# Altium PCB MaryLadder_8bits.PcbDoc (part 1 of 2)
Units mil, origin at the board's own origin, x right, y up, seen from the top; angles counter-clockwise.
Board outline 2465.9 x 2730.18 mil, 4 copper layers (Top Layer, Layer 1, Layer 2, Bottom Layer), stack 61.461 mil thick; 110 components, 105 nets, 478 pads, 183 vias.
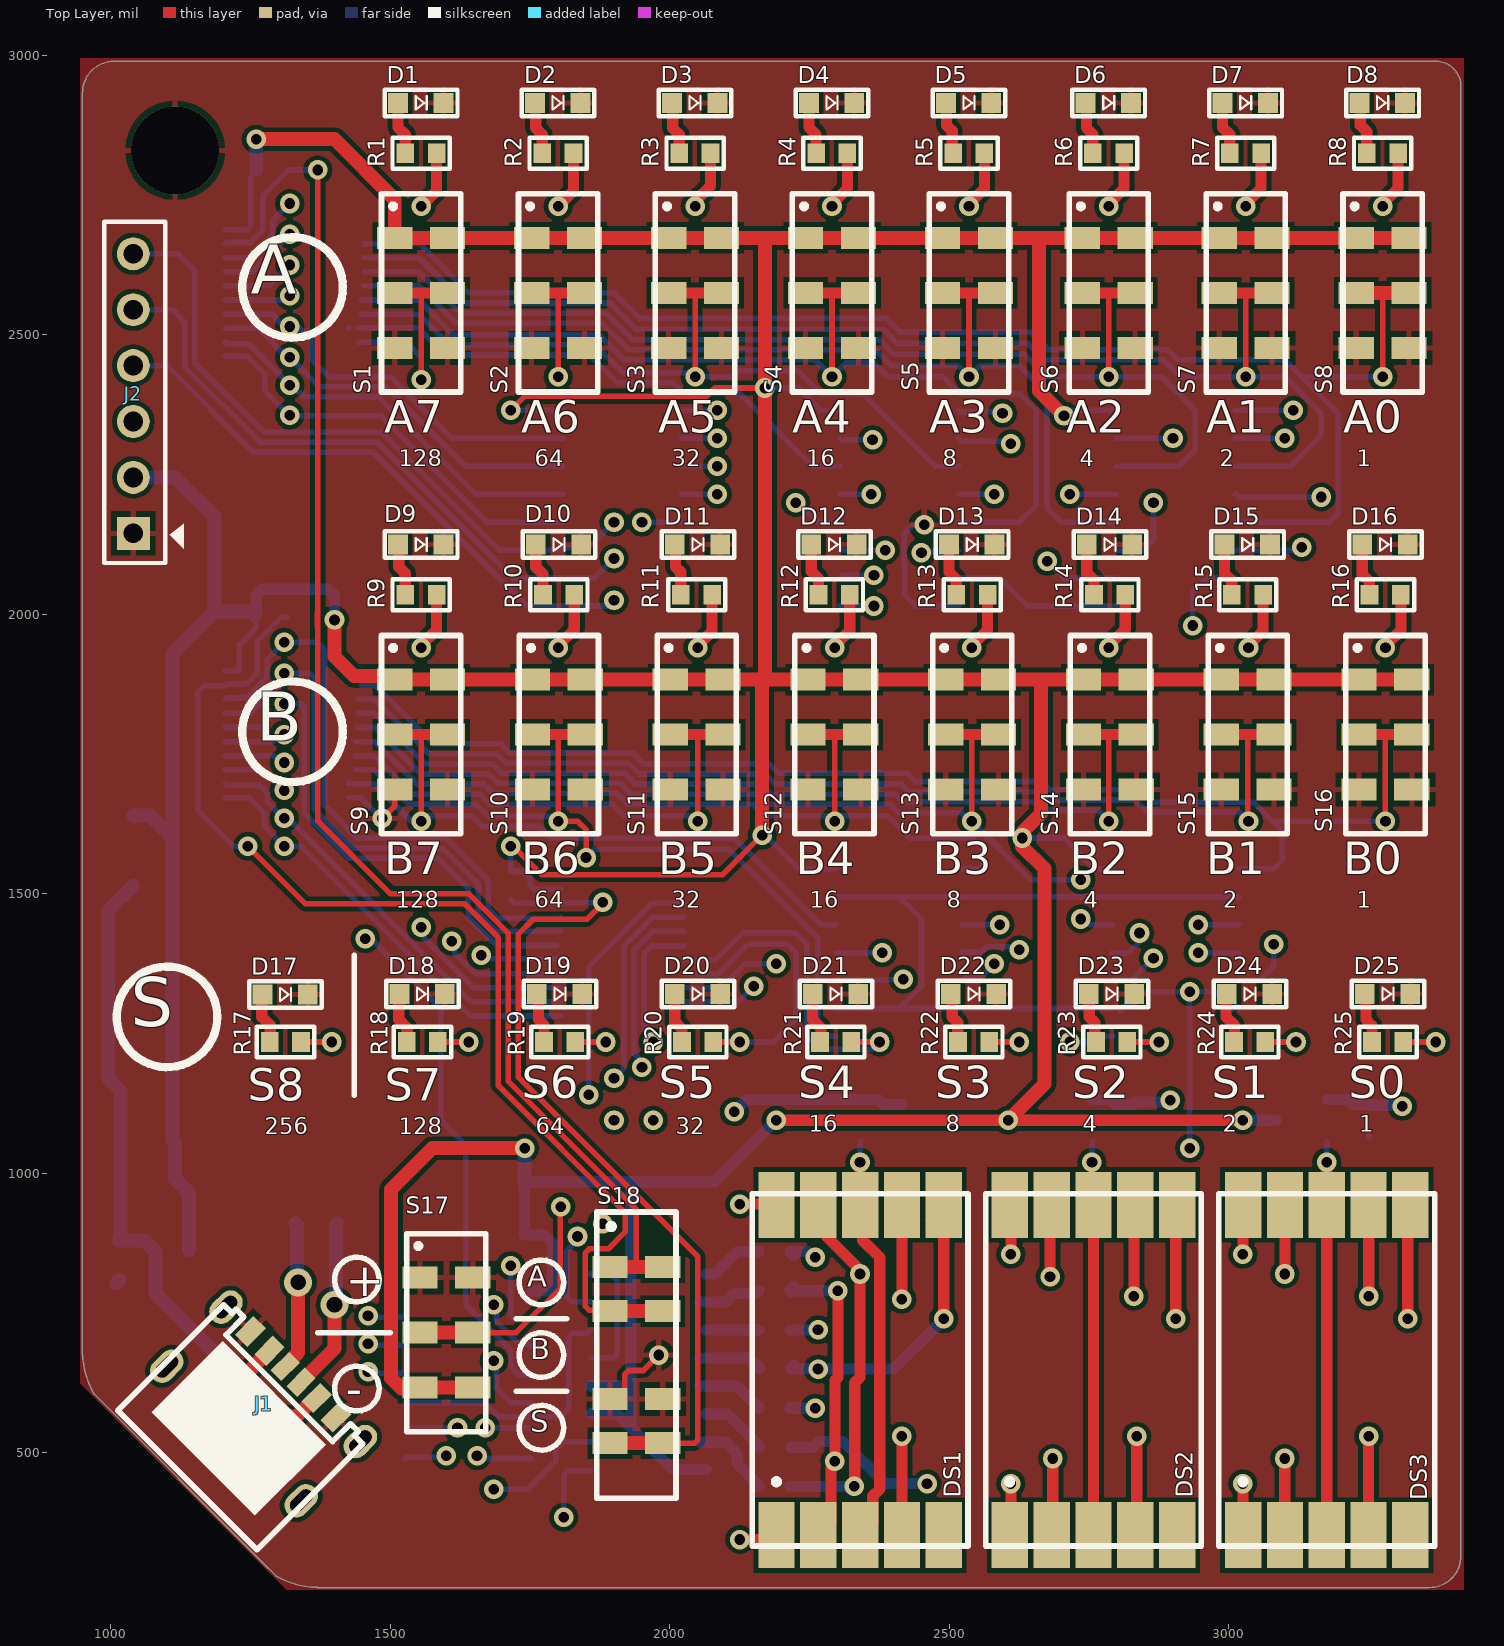
[diagram p0: Top Layer view]
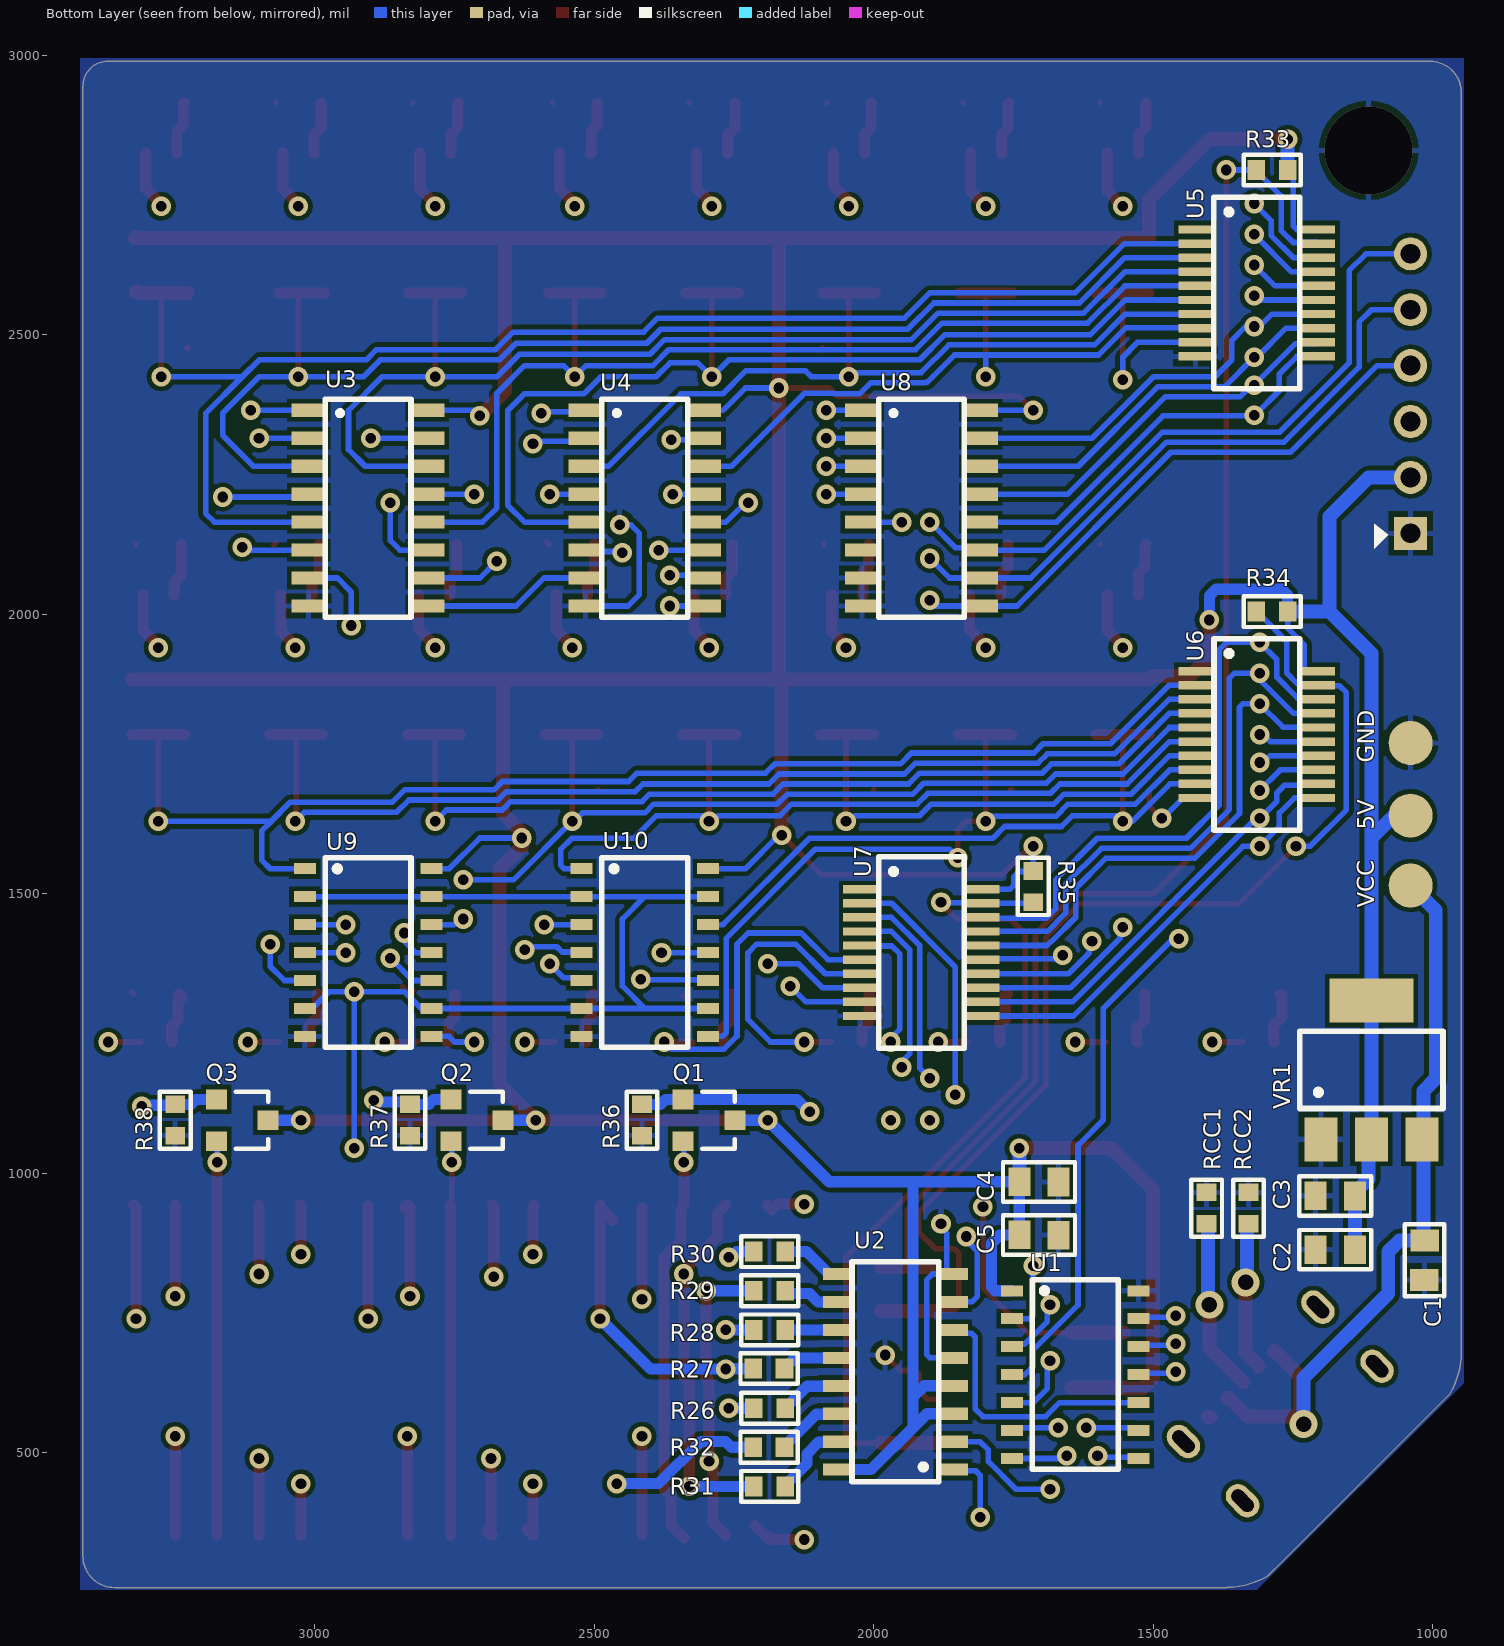
[diagram p1: Bottom Layer view, seen from below]
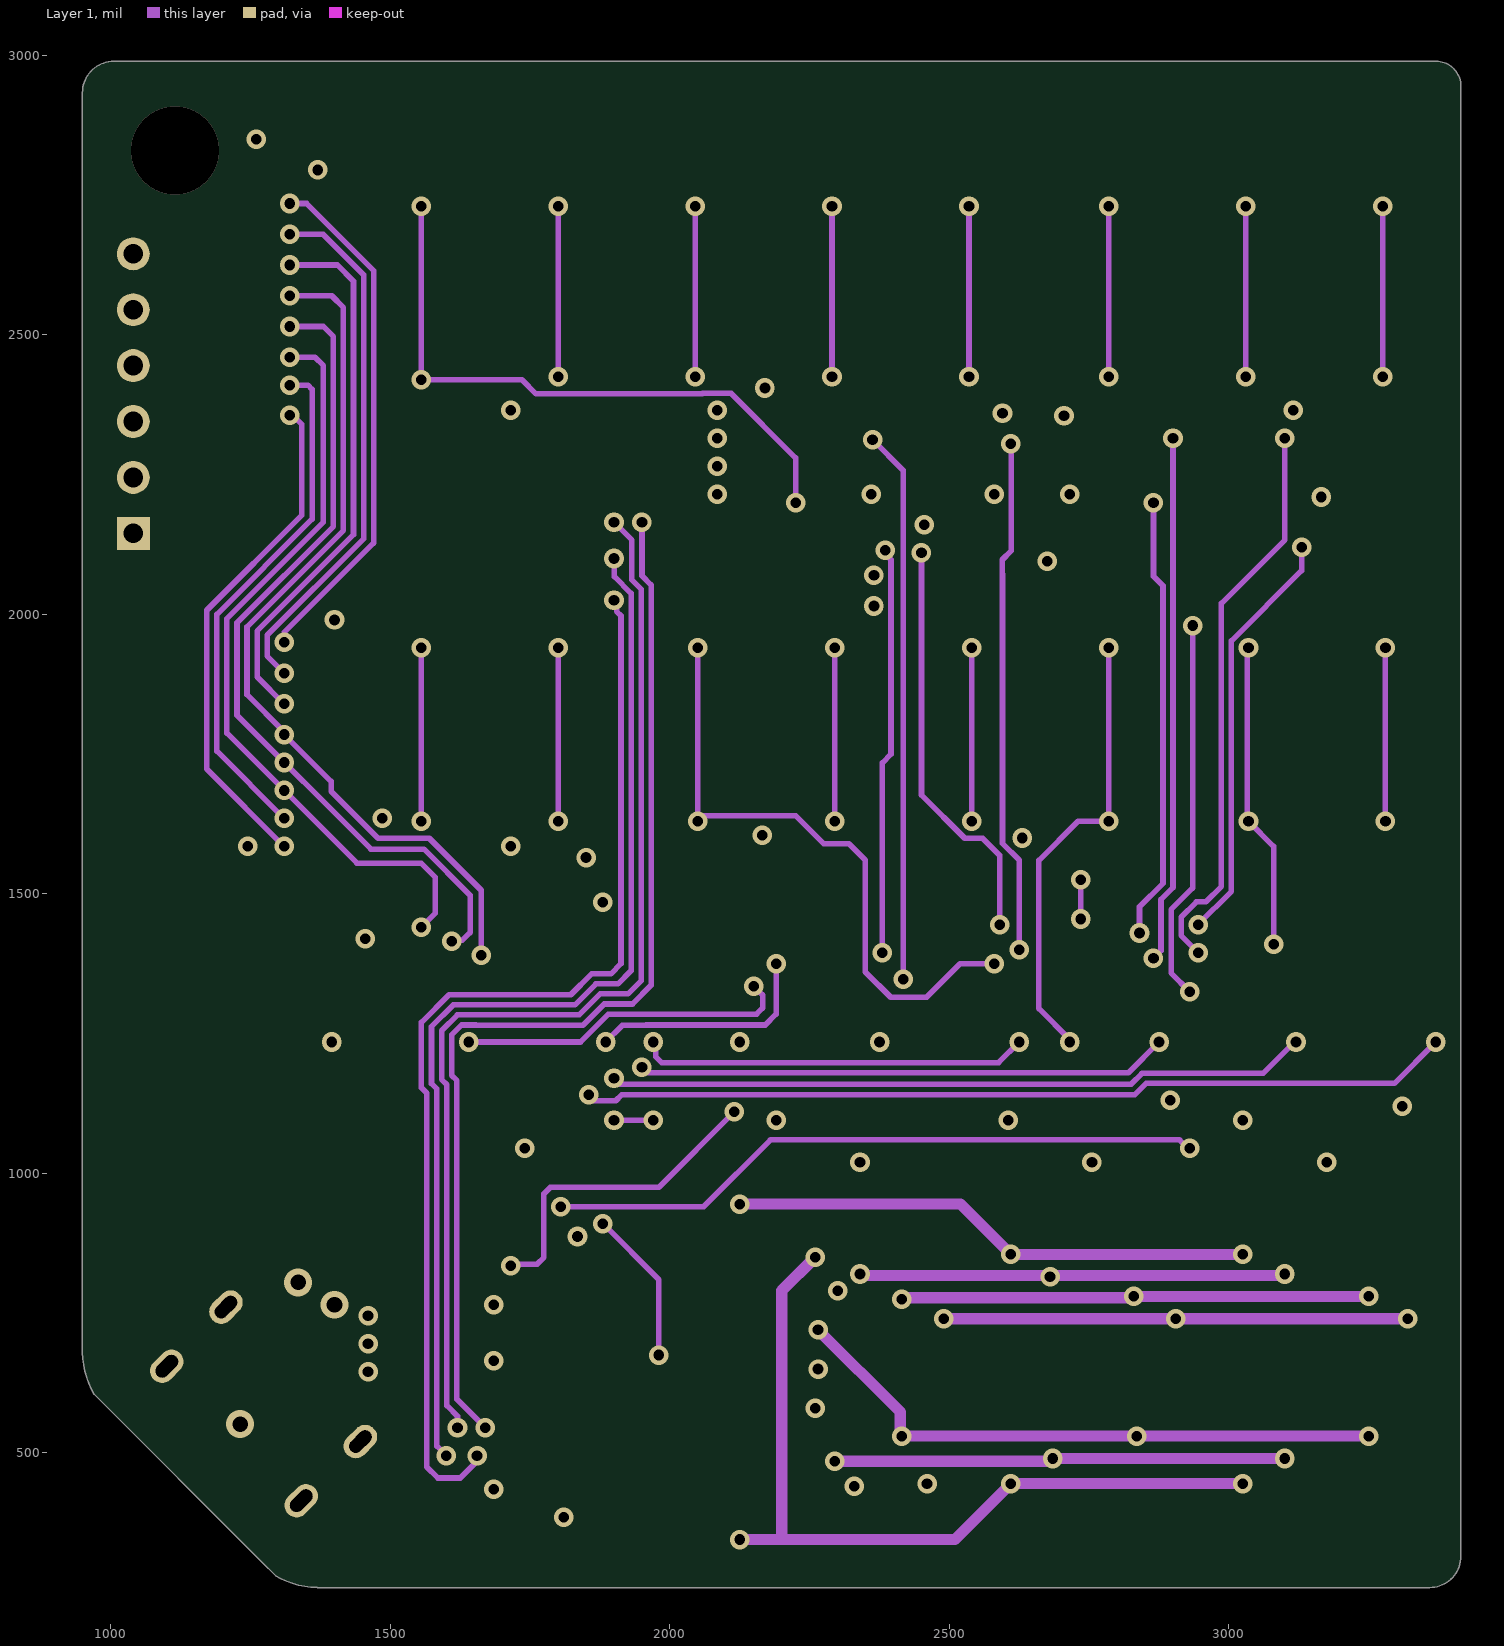
[diagram p2: Layer 1]
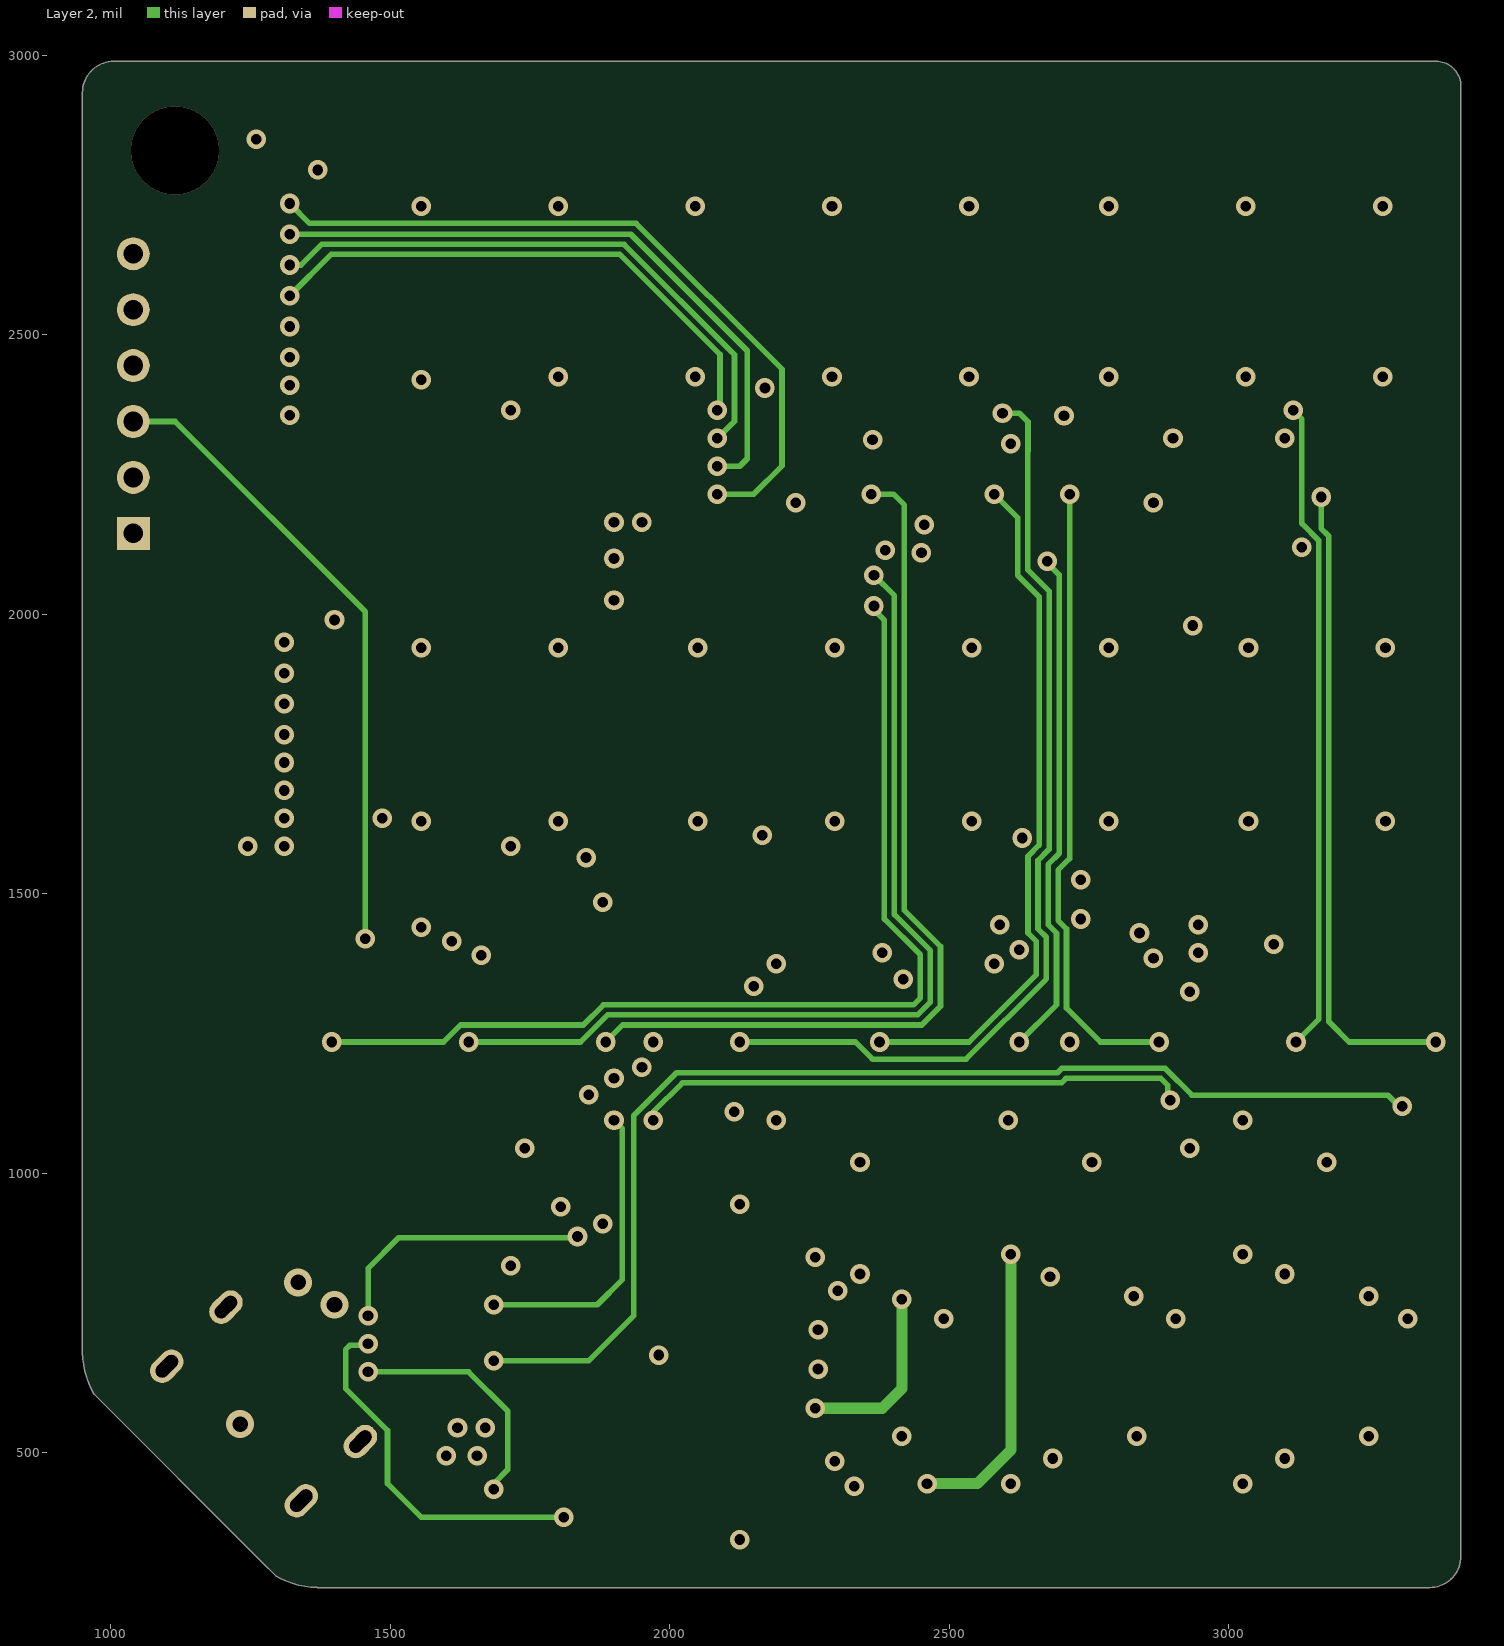
[diagram p3: Layer 2]
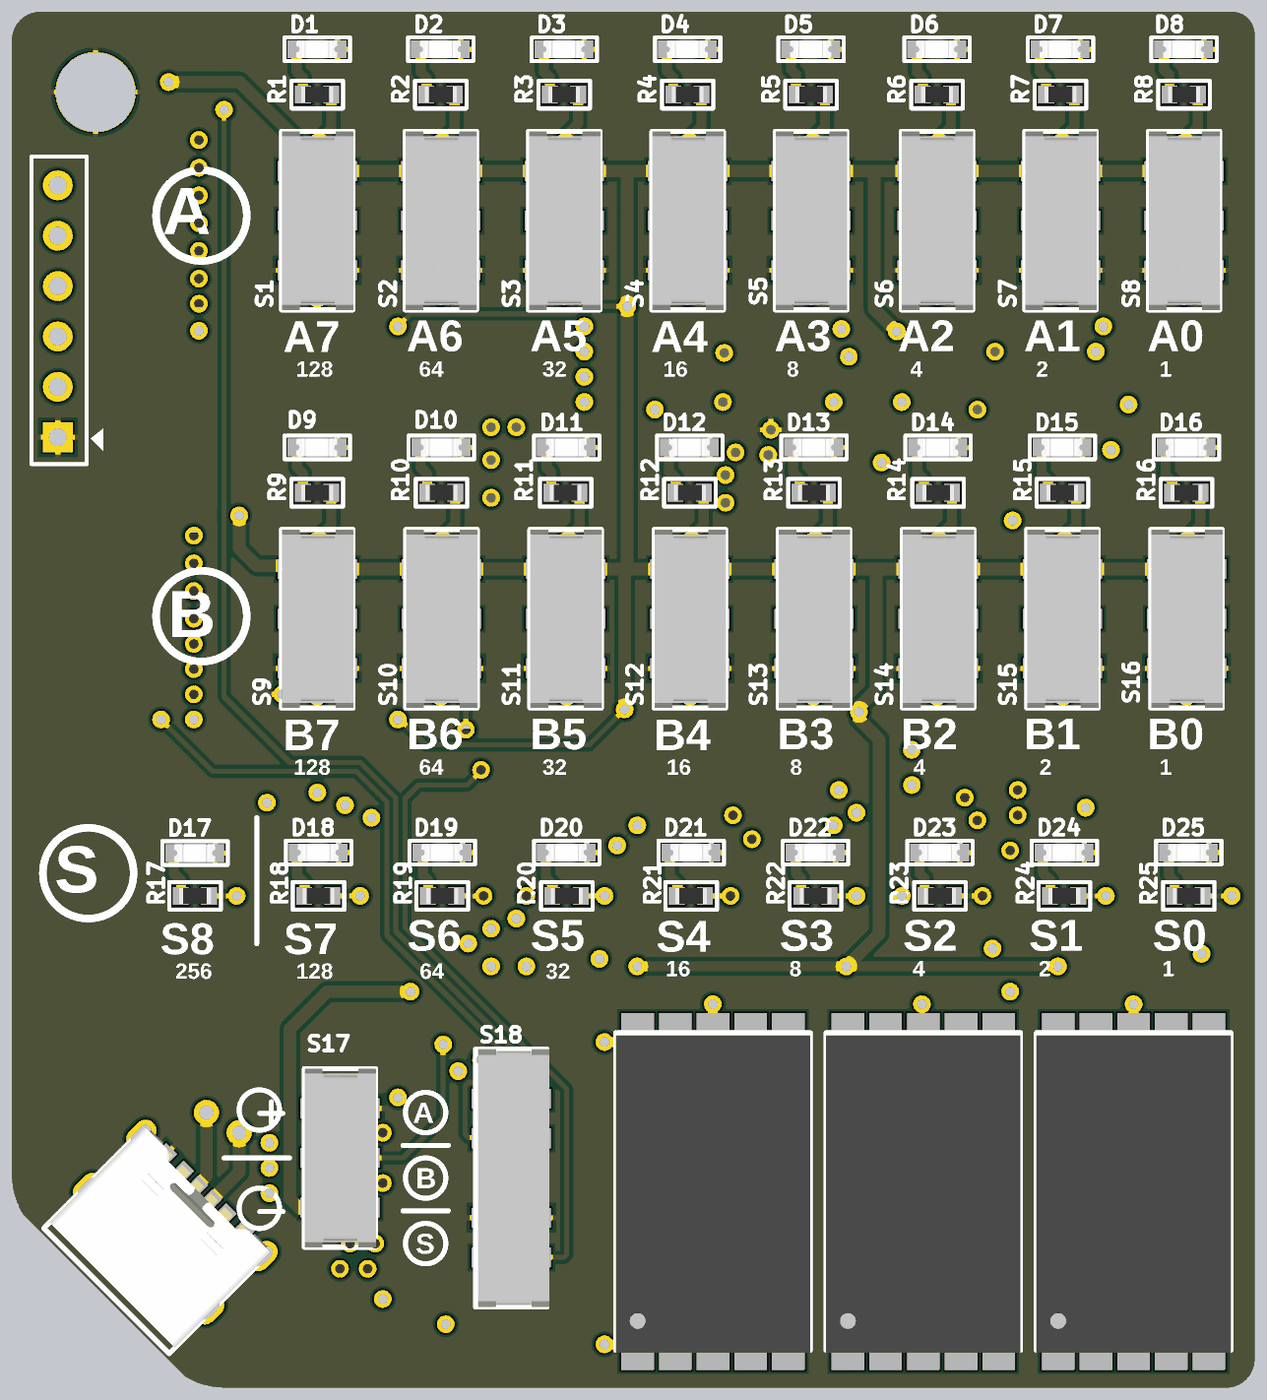
[diagram p5: 3D render of the assembled board from above, using the file's embedded part models]
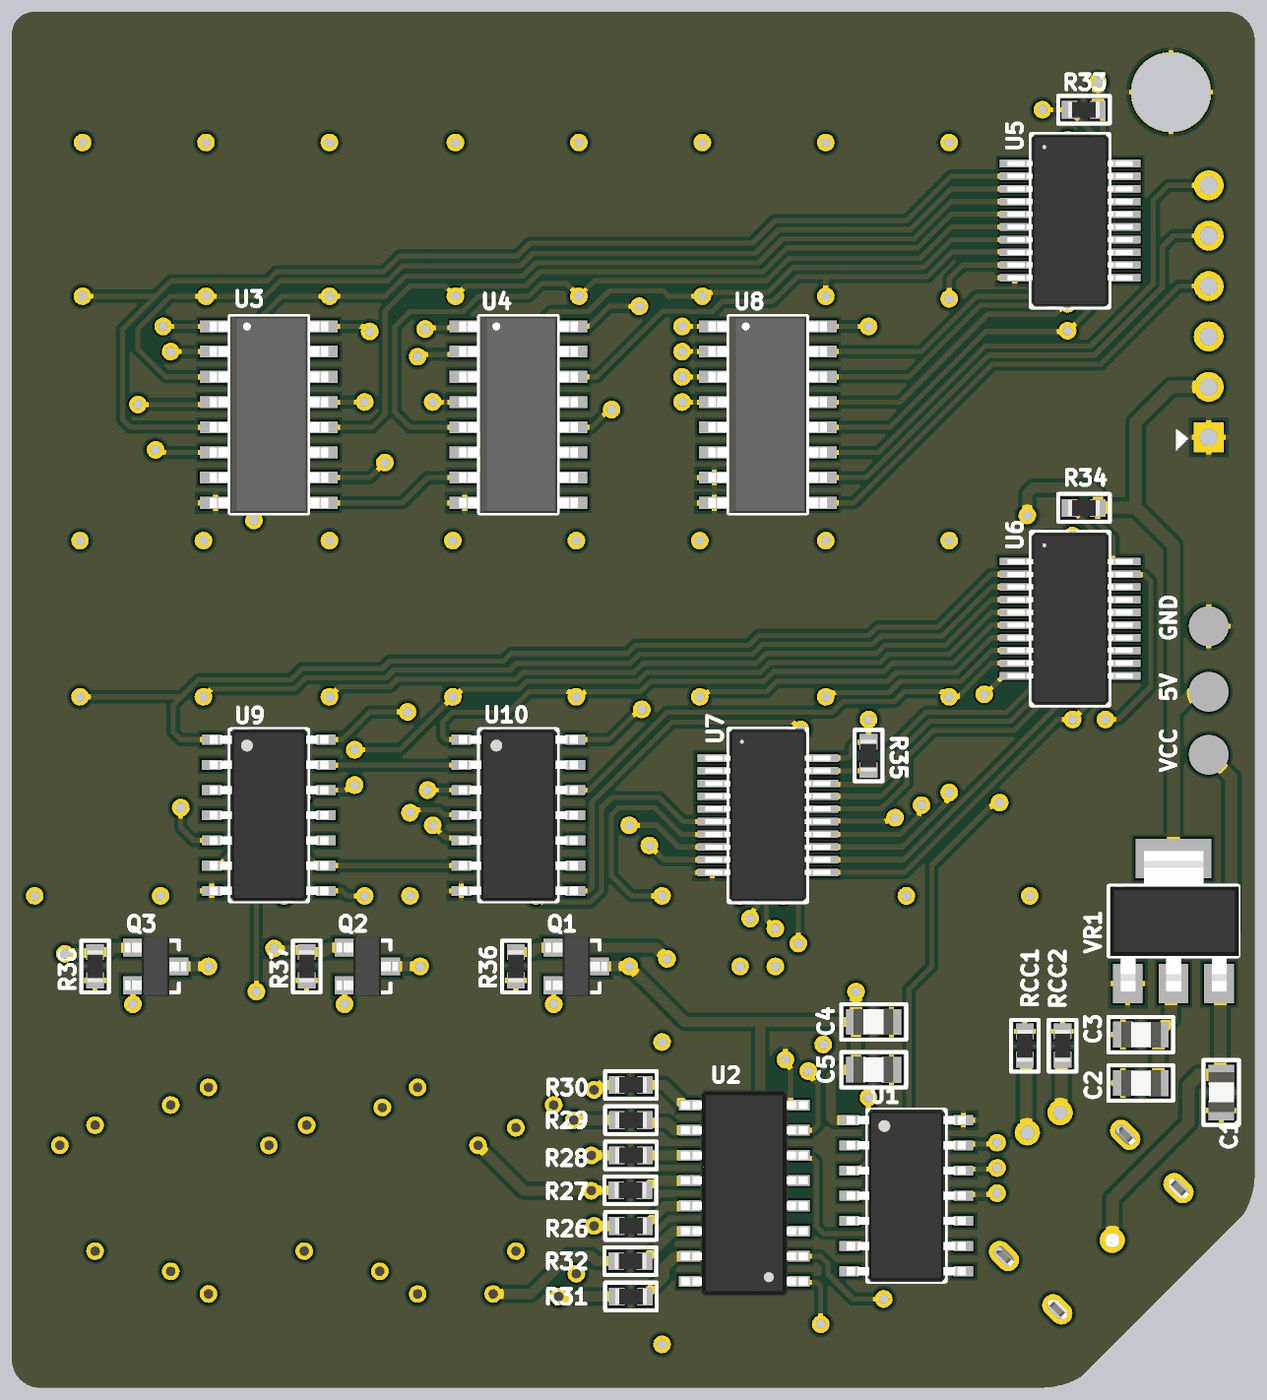
[diagram p6: 3D render of the assembled board from below, using the file's embedded part models]

## Layer stack, top to bottom
Top Solder: solder mask 0.4, Solder Resist, Dk 3.5
Top Layer: signal copper 1.4
Dielectric 2: prepreg 4.3307, PP-006, Dk 4.29
Layer 1: signal copper 1.3779
Dielectric 1: dielectric 47.2441, FR-4, Dk 4.8
Layer 2: signal copper 1.3779
Dielectric 3: prepreg 4.3307, PP-006, Dk 4.29
Bottom Layer: signal copper 1.4
Bottom Solder: solder mask 0.4, Solder Resist, Dk 3.5

## Board outline
970.41,604.62 cw(c1099.03,681.69) 949.1,680 949.1,2933.37 cw(c1005,2933.37) 1005,2989.27 3370.73,2989.27 cw(c3370.73,2945) 3415,2945 3415,315 cw(c3359.1,315) 3359.1,259.1 1369.15,259.1 1368.82,259.43 cw(c1370.48,406.99) 1294.63,280.4 1269.99,305.04 1269.96,305.07

## Design rules (kind name [scope] priority, off if disabled: settings)
Clearance [All] p1: gap=8 ignorepadtopadclearanceinfootprint=FALSE
PolygonConnect [All] p1: connectstyle=Relief reliefconductorwidth=10 reliefentries=4 polygonreliefangle="90 Angle" airgapwidth=10
RoomDefinition MaryLadder_8bits [InComponentClass('MaryLadder_8bits')] p1: confinementstyle=ConfineIn formatcopy=TRUE lockcomponents=FALSE outline 4060,300 3615,300 3615,790 4060,790
RoutingVias [All] p1: holewidth=19 width=35 viastyle="Through Hole" minholewidth=19 minwidth=35 maxholewidth=19 maxwidth=35
SolderMaskExpansion [All] p1: expansion=4 istentingtop=FALSE
Width [All] p1: maxlimit=100 minlimit=10 preferedwidth=10
30 further rules are at their usual default settings.

## Components (designator, comment, footprint, x,y, rotation, side; value= is the part's Value field where it differs from the comment)
5V "POINT_TEST_CMS_2MM" POINT_TEST_CMS_2MM 1040,1640 r0 top
C1 "CMS_0805" CONDENSATEUR_CMS_0805 1015.39,809.53 r90 bottom value=10uF
C2 "CMS_0805" CONDENSATEUR_CMS_0805 1210,863.66 r180 bottom value=10uF
C3 "CMS_0805" CONDENSATEUR_CMS_0805 1210,960 r180 bottom value=10uF
C4 "CMS_0805" CONDENSATEUR_CMS_0805 1669.53,984.61 r0 bottom value=10uF
C5 "CMS_0805" CONDENSATEUR_CMS_0805 1669.53,889.61 r0 bottom value=10uF
D1 "LED_CMS_0805" LED_CMS_0805 1513.66,2915 r90 top
D2 "LED_CMS_0805" LED_CMS_0805 1758.66,2915 r90 top
D3 "LED_CMS_0805" LED_CMS_0805 2003.66,2915 r90 top
D4 "LED_CMS_0805" LED_CMS_0805 2248.66,2915 r90 top
D5 "LED_CMS_0805" LED_CMS_0805 2493.66,2915 r90 top
D6 "LED_CMS_0805" LED_CMS_0805 2743.66,2915 r90 top
D7 "LED_CMS_0805" LED_CMS_0805 2988.66,2915 r90 top
D8 "LED_CMS_0805" LED_CMS_0805 3233.66,2915 r90 top
D9 "LED_CMS_0805" LED_CMS_0805 1513.66,2125 r90 top
D10 "LED_CMS_0805" LED_CMS_0805 1760.09,2125 r90 top
D11 "LED_CMS_0805" LED_CMS_0805 2008.75,2125 r90 top
D12 "LED_CMS_0805" LED_CMS_0805 2252.95,2125 r90 top
D13 "LED_CMS_0805" LED_CMS_0805 2499.38,2125 r90 top
D14 "LED_CMS_0805" LED_CMS_0805 2745.8,2125 r90 top
D15 "LED_CMS_0805" LED_CMS_0805 2992.23,2125 r90 top
D16 "LED_CMS_0805" LED_CMS_0805 3238.66,2125 r90 top
D17 "LED_CMS_0805" LED_CMS_0805 1271.1,1320 r90 top
D18 "LED_CMS_0805" LED_CMS_0805 1516.1,1320.91 r90 top
D19 "LED_CMS_0805" LED_CMS_0805 1761.88,1320.91 r90 top
D20 "LED_CMS_0805" LED_CMS_0805 2008.75,1320.91 r90 top
D21 "LED_CMS_0805" LED_CMS_0805 2255.62,1320.91 r90 top
D22 "LED_CMS_0805" LED_CMS_0805 2502.5,1320.91 r90 top
D23 "LED_CMS_0805" LED_CMS_0805 2749.38,1320.91 r90 top
D24 "LED_CMS_0805" LED_CMS_0805 2996.25,1320.91 r90 top
D25 "LED_CMS_0805" LED_CMS_0805 3243.12,1320.91 r90 top
DS1 "AFFICHEUR_7_SEGM_A.C_1_DIGIT" AFFICHEUR_7_SEGM_A.C_1_DIGIT 2340.39,648.33 r0 top
DS2 "AFFICHEUR_7_SEGM_A.C_1_DIGIT" AFFICHEUR_7_SEGM_A.C_1_DIGIT 2757.7,648.33 r0 top
DS3 "AFFICHEUR_7_SEGM_A.C_1_DIGIT" AFFICHEUR_7_SEGM_A.C_1_DIGIT 3175,648.33 r0 top
GND "POINT_TEST_CMS_2MM" POINT_TEST_CMS_2MM 1040,1770 r0 top
J1 "USB4125-GF-A" "TYPE-C FEMELLE" 1326.05,640.52 r315 top
J2 "BARRETTE_6 CONTACTS_1 RANGEE_MALE_DROITE" BARRETTE_6_M_D 1040,2145 r90 top
Q1 "TRANSISTOR_MOSFET-N_SOT23_GSD" TRANSISTOR_MOSFET-N_SOT23_GSD 2295,1095 r270 bottom
Q2 "TRANSISTOR_MOSFET-N_SOT23_GSD" TRANSISTOR_MOSFET-N_SOT23_GSD 2710,1095 r270 bottom
Q3 "TRANSISTOR_MOSFET-N_SOT23_GSD" TRANSISTOR_MOSFET-N_SOT23_GSD 3130,1095 r270 bottom
R1 "RESISTANCE_CMS_0603" RESISTANCE_CMS_0603 1582.56,2825 r180 top value=150
R2 "RESISTANCE_CMS_0603" RESISTANCE_CMS_0603 1827.56,2825 r180 top value=150
R3 "RESISTANCE_CMS_0603" RESISTANCE_CMS_0603 2072.56,2825 r180 top value=150
R4 "RESISTANCE_CMS_0603" RESISTANCE_CMS_0603 2317.56,2825 r180 top value=150
R5 "RESISTANCE_CMS_0603" RESISTANCE_CMS_0603 2562.56,2825 r180 top value=150
R6 "RESISTANCE_CMS_0603" RESISTANCE_CMS_0603 2812.56,2825 r180 top value=150
R7 "RESISTANCE_CMS_0603" RESISTANCE_CMS_0603 3057.56,2825 r180 top value=150
R8 "RESISTANCE_CMS_0603" RESISTANCE_CMS_0603 3302.56,2825 r180 top value=150
R9 "RESISTANCE_CMS_0603" RESISTANCE_CMS_0603 1582.56,2035 r180 top value=150
R10 "RESISTANCE_CMS_0603" RESISTANCE_CMS_0603 1828.99,2035 r180 top value=150
R11 "RESISTANCE_CMS_0603" RESISTANCE_CMS_0603 2075.42,2035 r180 top value=150
R12 "RESISTANCE_CMS_0603" RESISTANCE_CMS_0603 2321.84,2035 r180 top value=150
R13 "RESISTANCE_CMS_0603" RESISTANCE_CMS_0603 2568.27,2035 r180 top value=150
R14 "RESISTANCE_CMS_0603" RESISTANCE_CMS_0603 2814.7,2035 r180 top value=150
R15 "RESISTANCE_CMS_0603" RESISTANCE_CMS_0603 3061.13,2035 r180 top value=150
R16 "RESISTANCE_CMS_0603" RESISTANCE_CMS_0603 3307.56,2035 r180 top value=150
R17 "RESISTANCE_CMS_0603" RESISTANCE_CMS_0603 1340,1235 r180 top value=150
R18 "RESISTANCE_CMS_0603" RESISTANCE_CMS_0603 1585,1235 r180 top value=150
R19 "RESISTANCE_CMS_0603" RESISTANCE_CMS_0603 1830.77,1235 r180 top value=150
R20 "RESISTANCE_CMS_0603" RESISTANCE_CMS_0603 2077.65,1235 r180 top value=150
R21 "RESISTANCE_CMS_0603" RESISTANCE_CMS_0603 2324.52,1235 r180 top value=150
R22 "RESISTANCE_CMS_0603" RESISTANCE_CMS_0603 2571.4,1235 r180 top value=150
R23 "RESISTANCE_CMS_0603" RESISTANCE_CMS_0603 2818.27,1235 r180 top value=150
R24 "RESISTANCE_CMS_0603" RESISTANCE_CMS_0603 3065.15,1235 r180 top value=150
R25 "RESISTANCE_CMS_0603" RESISTANCE_CMS_0603 3312.02,1235 r180 top value=150
R26 "RESISTANCE_CMS_0603" RESISTANCE_CMS_0603 2159,580 r0 bottom value=150
R27 "RESISTANCE_CMS_0603" RESISTANCE_CMS_0603 2160,650.98 r0 bottom value=150
R28 "RESISTANCE_CMS_0603" RESISTANCE_CMS_0603 2159,720 r0 bottom value=150
R29 "RESISTANCE_CMS_0603" RESISTANCE_CMS_0603 2159,790 r0 bottom value=150
R30 "RESISTANCE_CMS_0603" RESISTANCE_CMS_0603 2159,860 r0 bottom value=150
R31 "RESISTANCE_CMS_0603" RESISTANCE_CMS_0603 2159,440 r0 bottom value=150
R32 "RESISTANCE_CMS_0603" RESISTANCE_CMS_0603 2160,510 r0 bottom value=150
R33 "RESISTANCE_CMS_0603" RESISTANCE_CMS_0603 1260,2795 r0 bottom value=10k
R34 "RESISTANCE_CMS_0603" RESISTANCE_CMS_0603 1260,2005 r0 bottom value=10k
R35 "RESISTANCE_CMS_0603" RESISTANCE_CMS_0603 1715,1541 r270 bottom value=10k
R36 "RESISTANCE_CMS_0603" RESISTANCE_CMS_0603 2415,1067.44 r90 bottom value=10k
R37 "RESISTANCE_CMS_0603" RESISTANCE_CMS_0603 2830,1067.44 r90 bottom value=10k
R38 "RESISTANCE_CMS_0603" RESISTANCE_CMS_0603 3250,1067.44 r90 bottom value=10k
RCC1 "RESISTANCE_CMS_0603" RESISTANCE_CMS_0603 1405,910 r90 bottom value=5,1K
RCC2 "RESISTANCE_CMS_0603" RESISTANCE_CMS_0603 1330,910 r90 bottom value=5,1K
S1 "JS202011JCQN" JS202011JCQN 1555,2575 r0 top
S2 "JS202011JCQN" JS202011JCQN 1800,2575 r0 top
S3 "JS202011JCQN" JS202011JCQN 2045,2575 r0 top
S4 "JS202011JCQN" JS202011JCQN 2290,2575 r0 top
S5 "JS202011JCQN" JS202011JCQN 2535,2575 r0 top
S6 "JS202011JCQN" JS202011JCQN 2785,2575 r0 top
S7 "JS202011JCQN" JS202011JCQN 3030,2575 r0 top
S8 "JS202011JCQN" JS202011JCQN 3275,2575 r0 top
S9 "JS202011JCQN" JS202011JCQN 1555,1785 r0 top
S10 "JS202011JCQN" JS202011JCQN 1801.43,1785 r0 top
S11 "JS202011JCQN" JS202011JCQN 2047.86,1785 r0 top
S12 "JS202011JCQN" JS202011JCQN 2294.29,1785 r0 top
S13 "JS202011JCQN" JS202011JCQN 2540.71,1785 r0 top
S14 "JS202011JCQN" JS202011JCQN 2787.14,1785 r0 top
S15 "JS202011JCQN" JS202011JCQN 3033.57,1785 r0 top
S16 "JS202011JCQN" JS202011JCQN 3280,1785 r0 top
S17 "JS202011JCQN" JS202011JCQN 1600,715 r0 top
S18 "JS203011JCQN" JS203011JCQN 1940,675 r0 top
U1 "ATTINY84V" ATTINY84V-10SSU 1640,640 r180 bottom
U2 "CD4511" CD4511 1961.65,645 r0 bottom
U3 "CD74ACT283M" CD74ACT283M 2905,2190 r180 bottom
U4 "CD74ACT283M" CD74ACT283M 2410,2190 r180 bottom
U5 "QS32245QG" QS32245QG 1315.04,2575 r180 bottom
U6 "QS32245QG" QS32245QG 1315,1785 r180 bottom
U7 "QS32245QG" QS32245QG 1915,1395 r180 bottom
U8 "74HC151D" 74HC151D 1915,2190 r180 bottom
U9 "CD4030BM96" CD4030BM96 2905,1395 r180 bottom
U10 "CD4030BM96" CD4030BM96 2410,1395 r180 bottom
VCC "POINT_TEST_CMS_2MM" POINT_TEST_CMS_2MM 1040,1515 r90 top
VR1 "NCV1117ST50T3G" NCV1117ST50T3G 1110,1185 r180 bottom

## Footprints (in the part's own frame and the unit in brackets; to place one, negate y for a bottom-side part, rotate by r counter-clockwise, add the part's x,y. Pads: shape width x height; smd on the part's side, far side on the other; paste and mask are expansions set on the pad)
74HC151D [mm] "IC MULTIPLEXER 1 X 8:1"
  rect 1.55x0.6 smd: 1(-2.7,4.445) 2(-2.7,3.175) 3(-2.7,1.905) 4(-2.7,0.635) 5(-2.7,-0.635) 6(-2.7,-1.905) 7(-2.7,-3.175) 8(-2.7,-4.445) 9(2.7,-4.445) 10(2.7,-3.175) 11(2.7,-1.905) 12(2.7,-0.635) 13(2.7,0.635) 14(2.7,1.905) 15(2.7,3.175) 16(2.7,4.445)
  silkscreen extent -1.95,-4.95 1.95,4.95, body extent -2.99,-4.95 2.99,4.95, height 1.35
AFFICHEUR_7_SEGM_A.C_1_DIGIT [mm] "VDMR10A1 - DISPLAY 7SEG 0.39\" SGL RED 10SMD"
  rect 1.65x3 smd: 1(-3.8,-7.5) 2(-1.9,-7.5) 3(0,-7.5) 4(1.9,-7.5) 5(3.8,-7.5) 6(3.8,7.5) 7(1.9,7.5) 8(0,7.5) 9(-1.9,7.5) 10(-3.8,7.5)
  silkscreen extent -4.9,-8 4.9,8, body extent -4.9,-8.13 4.9,7.87, height 2.11
ATTINY84V-10SSU [mm] "AVR series Microcontrôleurs IC 8 bits 10MHz 8Ko (4K x 16) FLASH 14-SOIC"
  rect 1x0.5 smd: 1(-2.875,3.81) 2(-2.875,2.54) 3(-2.875,1.27) 4(-2.875,0) 5(-2.875,-1.27) 6(-2.875,-2.54) 7(-2.875,-3.81) 8(2.875,-3.81) 9(2.875,-2.54) 10(2.875,-1.27) 11(2.875,0) 12(2.875,1.27) 13(2.875,2.54) 14(2.875,3.81)
  silkscreen extent -1.95,-4.31 1.95,4.31, body extent -3,-4.35 3,4.35, height 1.75
BARRETTE_6_M_D [mm] "BARRETTE 6 CONTACTS ; 1 RANGEE ; DROITE ; MALE ; ESPACEMENT BROCHES = 2.54 mm"
  rect 1.5x1.5 hole 0.9: 1(0,0)
  round 1.5 hole 0.9: 2(2.54,0) 3(5.08,0) 4(7.62,0) 5(10.16,0) 6(12.7,0)
  silkscreen extent -1.35,-1.46 14.15,1.32, body extent -1.22,-1.34 14.02,1.2, height 0.25
CD74ACT283M [mm] "4-Bit Binary Fill Adder With Fast Carry"
  rect 1.55x0.6 smd: 1(-2.7,4.445) 2(-2.7,3.175) 3(-2.7,1.905) 4(-2.7,0.635) 5(-2.7,-0.635) 6(-2.7,-1.905) 7(-2.7,-3.175) 8(-2.7,-4.445) 9(2.7,-4.445) 10(2.7,-3.175) 11(2.7,-1.905) 12(2.7,-0.635) 13(2.7,0.635) 14(2.7,1.905) 15(2.7,3.175) 16(2.7,4.445)
  silkscreen extent -1.95,-4.95 1.95,4.95, body extent -2.99,-4.95 2.99,4.95, height 1.35
CD4030BM96 [mm] "IC GATE XOR 4CH 2-INP 14SOIC"
  rect 1x0.5 smd: 1(-2.875,3.81) 2(-2.875,2.54) 3(-2.875,1.27) 4(-2.875,0) 5(-2.875,-1.27) 6(-2.875,-2.54) 7(-2.875,-3.81) 8(2.875,-3.81) 9(2.875,-2.54) 10(2.875,-1.27) 11(2.875,0) 12(2.875,1.27) 13(2.875,2.54) 14(2.875,3.81)
  silkscreen extent -1.95,-4.31 1.95,4.31, body extent -3,-4.35 3,4.35, height 1.75
CD4511 [mm] "CMOS BCD to 7 Segment Latch Decoder Drivers"
  rect 1.35x0.55 smd: 1(-2.625,4.445) 2(-2.625,3.175) 3(-2.625,1.905) 4(-2.625,0.635) 5(-2.625,-0.635) 6(-2.625,-1.905) 7(-2.625,-3.175) 8(-2.625,-4.445) 9(2.625,-4.445) 10(2.625,-3.175) 11(2.625,-1.905) 12(2.625,-0.635) 13(2.625,0.635) 14(2.625,1.905) 15(2.625,3.175) 16(2.625,4.445)
  silkscreen extent -1.97,-5 1.97,5, body extent -3.2,-5.2 3.2,5.2, height 2.1
CONDENSATEUR_CMS_0805 [mm] "CONDENSATEUR CMS 0805 ; DIMENSIONS : 2mm x 1.25mm"
  rect 1x1.3 smd: 1(0,0) 2(1.79,-0.01)
  silkscreen extent -0.74,-0.9 2.53,0.89, body extent -0.09,-0.67 1.91,0.64, height 0.73
JS202011JCQN [mm] "SWITCH SLIDE DPDT 300MA 6V"
  rect 1.6x1 smd: 1(-1.2,2.5) 2(-1.2,0) 3(-1.2,-2.5) 4(1.2,2.5) 5(1.2,0) 6(1.2,-2.5)
  silkscreen extent -1.8,-4.5 1.8,4.5, body extent -1.78,-4.5 1.82,4.5, height 5.57
JS203011JCQN [mm] "SWITCH SLIDE DP3T 300MA 6V"
  rect 1.6x1 smd: 1(-1.2,4) 2(-1.2,2) 3(-1.2,-2) 4(-1.2,-4) 5(1.2,4) 6(1.2,2) 7(1.2,-2) 8(1.2,-4)
  silkscreen extent -1.8,-6.5 1.8,6.5, body extent -1.67,-6.5 1.93,6.5, height 5.62
LED_CMS_0805 [mm] "LED CMS 0805 ; DIMENSIONS : 2.0mm x 0.9mm"
  rect 0.9x0.9 smd: 1(0,0) 2(0,-2.063)
  silkscreen extent -0.6,-2.7 0.6,0.6, body extent -0.45,-2.06 0.45,0, height 0.85
NCV1117ST50T3G [mm] "IC REG LINEAR 5V 1A SOT223"
  rect 1.5x2 smd: 1(-2.3,-3.15) 2(0,-3.15) 3(2.3,-3.15)
  rect 3.8x2 smd: 2(0,3.15)
  silkscreen extent -3.25,-1.75 3.25,1.75, body extent -3.2,-3.54 3.3,3.54, height 1.5
POINT_TEST_CMS_2MM [mm] "*"
  round 2 smd far side: 1(0,0)
QS32245QG [mm] "IC BUS SWITCH 1 X 8:1 20QSOP"
  rect 1.52x0.38 smd: 1(-2.795,2.88) 2(-2.795,2.24) 3(-2.795,1.6) 4(-2.795,0.96) 5(-2.795,0.32) 6(-2.795,-0.32) 7(-2.795,-0.96) 8(-2.795,-1.6) 9(-2.795,-2.24) 10(-2.795,-2.88) 11(2.795,-2.88) 12(2.795,-2.24) 13(2.795,-1.6) 14(2.795,-0.96) 15(2.795,-0.32) 16(2.795,0.32) 17(2.795,0.96) 18(2.795,1.6) 19(2.795,2.24) 20(2.795,2.88)
  silkscreen extent -1.95,-4.35 1.95,4.35, body extent -3.16,-4.35 3.16,4.35, height 1.1
RESISTANCE_CMS_0603 [mm] "RESISTANCE CMS 0603 ; DIMENSIONS : 1.6mm x 0.8mm"
  rect 0.8x0.9 smd: 1(0,0) 2(1.422,0)
  silkscreen extent -0.6,-0.7 2,0.7, body extent -0.1,-0.4 1.5,0.4, height 0.44
TRANSISTOR_MOSFET-N_SOT23_GSD [mm] "SOT23 ; DIMENSIONS : 3.0mm x 2.5 mm"
  rect 0.9x0.95 smd: 1(-0.95,-1.175) 2(0.95,-1.175) 3(0,1.175)
  silkscreen extent -1.3,-0.3 1.3,1.18, body extent -1.5,-1.57 1.5,1.57, height 1.1
"TYPE-C FEMELLE" [mm] "USB4125-GF-A / CONN RCPT TYPE C 6P SMD RA"
  rrect100% 1.1x1.7 hole 1.2 slot 0.6 at 0 deg: 1(-4.32,0) 2(4.32,0) 3(-4.32,-3.8) 4(4.32,-3.8)
  rect 0.7x1.2 smd: A5(-0.5,0) B5(0.5,0)
  rect 0.76x1.2 smd: A9(1.52,0) B9(-1.52,0)
  rect 0.8x1.2 smd: A12(2.75,0) B12(-2.75,0)
  silkscreen extent -4.47,-6.8 4.47,0.25, body extent -4.47,-6.39 4.47,0.51, height 3.26

## Part data
C1 C2 C3 C4 C5: library part CONDENSATEUR_CMS_CER_0805, "CONDENSATEUR CMS CERAMIQUE 0805", Type=CMS_0805
D1 D2 D3 D4 D5 D6 D7 D8 D9 D10 D11 D12 D13 D14 D15 D16 D17 D18 D19 D20 D21 D22 D23 D24 D25: "LED CMS 0805", Type=CMS_0805
DS1 DS2 DS3: "VDMR10A1 - DISPLAY 7SEG 0.39\" SGL RED 10SMD", Type=SMD-10
J1: library part "TYPE-C FEMELLE", "CONN RCPT TYPE C 6P SMD RA"
J2: "BARRETTE 6 CONTACTS 1 RANGEE MALE DROITE", Type=M_D_6
Q1 Q2 Q3: "TRANSISTOR MOSFET CANAL N BOITIER SOT23_GSD", Package=N_SOT23
R1 R2 R3 R4 R5 R6 R7 R8 R9 R10 R11 R12 R13 R14 R15 R16 R17 R18 R19 R20 R21 R22 R23 R24 R25 R26 R27 R28 R29 R30 R31 R32 R33 R34 R35 R36 R37 R38 RCC1 RCC2: "RESISTANCE CMS 0603", Type=CMS_0603
S1 S2 S3 S4 S5 S6 S7 S8 S9 S10 S11 S12 S13 S14 S15 S16 S17: "SWITCH SLIDE DPDT 300MA 6V"
S18: "SWITCH SLIDE DP3T 300MA 6V"
U1: library part ATTINY84V-10SSU, "AVR series Microcontrôleurs IC 8 bits 10MHz 8Ko (4K x 16) FLASH 14-SOIC", Type=SOIC-14
U2: "CMOS BCD to 7 Segment Latch Decoder Drivers"
U3 U4: "4-Bit Binary Fill Adder With Fast Carry", Type=SOIC-16
U5 U6 U7: "IC BUS SWITCH 1 X 8:1 20QSOP", Type=QSOP-20
U8: "IC MULTIPLEXER 1 X 8:1", Type=SOIC-16
U9 U10: "IC GATE XOR 4CH 2-INP 14SOIC"
VR1: "IC REG LINEAR 5V 1A SOT223", Type=SOT-223

## Via types
v1: diameter 35, hole 19, Top Layer to Bottom Layer, 179 vias
v2: diameter 50, hole 28, Top Layer to Bottom Layer, 3 vias
v3: diameter 157.48, hole 157.48, Top Layer to Bottom Layer, 1 vias

## Nets (pads, with @x,y where several pads share a name; then routed paths per layer and width w, separated by ;. In a path a pad name is that pad's centre, name@x,y a point inside that pad or via, vN(x,y) a via of type N, cw(c..) or ccw(c..) an arc to the next point about the centre after c; other vN are vias at no path point)
5V: 5V.1 C2.2 C3.2 C4.2 C5.2 J2.2 Q1.3 Q2.3 Q3.3 R33.1 R34.1 R35.1 S1.1 S1.4 S2.1 S2.4 S3.1 S3.4 S4.1 S4.4 S5.1 S5.4 S6.1 S6.4 S7.1 S7.4 S8.1 S8.4 S9.1 S9.4 S10.1 S10.4 S11.1 S11.4 S12.1 S12.4 S13.1 S13.4 S14.1 S14.4 S15.1 S15.4 S16.1 S16.4 S17.3 S17.6 U1.1 U2.3 U2.4 U2.16 U3.16 U4.16 U5.20 U6.20 U7.20 U8.16 U9.14 U10.14 VR1.2 | length 13885.7
  Top Layer w10: v1@1715,1590 1770.5,1534.5 2094.5,1534.5 v1(2165,1605) ; v1(1715,2365) 1740,2390 2065,2390 2080,2405 v1(2170,2405)
  Top Layer w20: v1(2190,1095) v1(2605,1095) v1(3025,1095)
  Top Layer w25: v1(1260,2850) 1400,2850 1507.76,2742.24 S1.1@1507.76,2673.43 S1.4@1602.24,2673.43 S2.1@1752.76,2673.43 S2.4@1847.24,2673.43 S3.1@1997.76,2673.43 S3.4@2092.24,2673.43 2167.5,2673.43 ; v1(1400,1990) 1400,1925 1435,1890 1501.18,1890 S9.1@1507.76,1883.43 S9.4@1602.24,1883.43 S10.1@1754.18,1883.43 S10.4@1848.67,1883.43 S11.1@2000.61,1883.43 S11.4@2095.1,1883.43 2168.93,1883.43 ; S17.6@1647.24,616.57 S17.3@1552.76,616.57 1551.18,615 1519.64,615 1500.76,633.88 1500.76,970.76 1575,1045 v1(1740,1045) ; v1(2165,1605) 2165,1879.5 2168.93,1883.43 ; v1(2605,1095) 2670,1160 2670,1545 2630,1585 v1(2630,1600) 2631.91,1601.91 2631.91,1611.91 2663.93,1643.93 2663.93,1883.43 ; v1(2705,2355) 2660,2400 2660,2673.43 ; S8.4@3322.24,2673.43 3321.57,2673.43 3320,2675 3318.43,2673.43 S8.1@3227.76,2673.43 S7.4@3077.24,2673.43 S7.1@2982.76,2673.43 S6.4@2832.24,2673.43 S6.1@2737.76,2673.43 2660,2673.43 ; S16.4@3327.24,1883.43 S16.1@3232.76,1883.43 S15.4@3080.82,1883.43 S15.1@2986.33,1883.43 S14.4@2834.39,1883.43 S14.1@2739.9,1883.43 2663.93,1883.43 ; 2167.5,2673.43 2170,2670.93 v1(2170,2405) 2170,1884.5 2168.93,1883.43 ; 2167.5,2673.43 S4.1@2242.76,2673.43 S4.4@2337.24,2673.43 S5.1@2487.76,2673.43 S5.4@2582.24,2673.43 2660,2673.43 ; 2168.93,1883.43 S12.1@2247.04,1883.43 S12.4@2341.53,1883.43 S13.1@2493.47,1883.43 S13.4@2587.96,1883.43 2663.93,1883.43
  Bottom Layer w10: U6.20@1204.96,1898.39 1227.4,1898.39 1229.88,1900.87 1229.88,1945.34 1260,1975.46 R34.1@1260,2003.03 ; U5.20@1205,2688.39 1243.39,2688.39 1250,2695 1250,2783.03 1260,2793.03 R33.1@1260,2795 ; v1(1715,1585) R35.1@1715,1541 1716,1540 1740,1540 1750,1530 1750,1515 1756.61,1508.39 U7.20@1804.96,1508.39 ; v1(1715,2365) U8.16@1808.7,2365 ; v1(2165,1605) 2170,1605 2230,1545 U10.14@2296.81,1545 ; v1(2170,2405) 2230,2405 2270,2365 U4.16@2303.7,2365 ; v1(2630,1600) 2705,1600 2760,1545 U9.14@2791.81,1545 ; v1(2705,2355) 2715,2365 U3.16@2798.7,2365
  Bottom Layer w20: R34.1@1260,2005 1260,2035 1270,2045 1388.28,2045 1400,2033.28 v1(1400,1990) ; U1.1@1753.19,790 1783.28,790 1790,796.72 1790,875 1775,890 C5.2@1740,890 C4.2@1740,985 1930,985 ; U2.3@1858.31,570 1905,570 1930,545 ; U2.4@1858.31,620 1910,620 1930,600 ; U2.16@2065,470 2005,470 1930,545 ; Q1.3@2248.74,1095 v1(2190,1095) 2080,985 1930,985 ; v1(2605,1095) Q2.3@2663.74,1095 ; v1(3025,1095) Q3.3@3083.74,1095 ; 1930,545 1930,600 ; 1930,600 1930,985
  Bottom Layer w25: 5V.1@1040,1640 1070,1640 1110,1600 ; J2.2@1040,2245 1115,2245 1185,2175 1185,2005 ; C2.2@1139.53,863.27 C3.2@1139.53,959.61 1139.53,965.51 1115,990.04 1115,1055.98 VR1.2@1110,1060.98 VR1.2@1110,1309.02 1110,1600 ; R34.1@1260,2005 1260,2003.03 1256.75,1999.78 1254.78,1999.78 1249.57,2005 1185,2005 ; R33.1@1260,2795 v1(1260,2850) ; C4.2@1740,985 v1(1740,1045) ; 1110,1600 1110,1930 1185,2005
A0: R8.1 S8.2 S8.5 U3.5 U5.2 | length 3041.4
  Top Layer w10: 3272.76,2575 3275,2572.76 v1(3275,2425)
  Top Layer w20: v1(3275,2730) 3275,2734.06 3302.56,2761.62 R8.1@3302.56,2825 ; S8.5@3320,2577.24 S8.5@3322.24,2575
  Top Layer w25: S8.2@3227.76,2575 3272.76,2575 3317.76,2575 S8.5@3320,2577.24
  Layer 1 w10: v1(3275,2425) v1(3275,2730)
  Bottom Layer w10: U5.2@1453.18,2663.19 1551.81,2663.19 1640,2575 1900.33,2575 1945.33,2530 2386.92,2530 2411.92,2505 2645.46,2505 2676.96,2473.5 2890.01,2473.5 2908.01,2455.5 3099.5,2455.5 3130,2425 ; U3.5@3011.3,2165 3180,2165 3195.5,2180.5 3195.5,2359.5 3130,2425 ; v1(3275,2425) 3130,2425
A1: R7.1 S7.2 S7.5 U3.3 U5.3 | length 2689.9
  Top Layer w10: 3023.88,2575 3030,2568.88 v1(3030,2425)
  Top Layer w20: S7.2@2982.76,2575 3023.88,2575 S7.5@3065,2575 ; v1(3030,2730) 3030,2734.06 3057.56,2761.62 R7.1@3057.56,2825
  Layer 1 w10: v1(3030,2425) v1(3030,2730)
  Bottom Layer w10: U5.3@1452.92,2637.99 1551.55,2637.99 1632.54,2557 1892.87,2557 1939.87,2510 2381.46,2510 2406.46,2485 2640,2485 2669.5,2455.5 2882.55,2455.5 2913.05,2425 v1(3030,2425) 3100,2425 3165,2360 3165,2320 3110,2265 U3.3@3011.3,2265
A2: R6.1 S6.2 S6.5 U3.14 U5.4 | length 2469.6
  Top Layer w10: v1(2785,2425) 2785,2575
  Top Layer w20: S6.2@2737.76,2575 2785,2575 S6.5@2832.24,2575 ; v1(2785,2730) 2785,2734.06 2812.56,2761.62 R6.1@2812.56,2825
  Layer 1 w10: v1(2785,2425) v1(2785,2730)
  Bottom Layer w10: U5.4@1452.66,2612.8 1551.29,2612.8 1625.09,2539 1885.42,2539 1932.92,2491.5 2374.51,2491.5 2401.01,2465 2634.54,2465 2674.54,2425 v1(2785,2425) 2880,2425 2940,2365 2940,2295 2910,2265 U3.14@2798.7,2265
A3: R5.1 S5.2 S5.5 U3.12 U5.5 | length 2313.9
  Top Layer w10: v1(2535,2425) 2535,2575
  Top Layer w20: S5.2@2487.76,2575 2535,2575 S5.5@2582.24,2575 ; v1(2535,2730) 2535,2734.06 2562.56,2761.62 R5.1@2562.56,2825
  Layer 1 w10: v1(2535,2425) v1(2535,2730)
  Bottom Layer w10: U5.5@1452.4,2587.6 1551.03,2587.6 1617.63,2521 1877.96,2521 1925.46,2473.5 2367.05,2473.5 2395.55,2445 2515,2445 v1(2535,2425) 2555,2445 2625,2445 2674.5,2395.5 2674.5,2190.5 2700,2165 U3.12@2798.7,2165
A4: R4.1 S4.2 S4.5 U4.5 U5.6 | length 2285.9
  Top Layer w10: v1(2290,2425) 2290,2575
  Top Layer w20: S4.2@2242.76,2575 2290,2575 S4.5@2337.24,2575 ; v1(2290,2730) 2290,2734.06 2317.56,2761.62 R4.1@2317.56,2825
  Layer 1 w10: v1(2290,2425) v1(2290,2730)
  Bottom Layer w10: U5.6@1448.6,2562.4 1550.78,2562.4 1613.18,2500 1873.51,2500 1918.01,2455.5 2259.5,2455.5 v1(2290,2425) 2315,2450 2365.09,2450 2390.09,2425 2488.57,2425 2519.07,2394.5 2625.5,2394.5 2655,2365 2655,2195 2625,2165 U4.5@2516.3,2165
A5: R3.1 S3.2 S3.5 U4.3 U5.7 | length 1846
  Top Layer w10: v1(2045,2425) 2045,2575
  Top Layer w20: S3.2@1997.76,2575 2045,2575 S3.5@2092.24,2575 ; v1(2045,2730) 2045,2739.06 2072.56,2766.62 R3.1@2072.56,2825
  Layer 1 w10: v1(2045,2425) v1(2045,2730)
  Bottom Layer w10: U5.7@1447.8,2537.2 1550.52,2537.2 1605.72,2482 1866.05,2482 1915.55,2432.5 2032.5,2432.5 2040,2425 v1(2045,2425) 2111.95,2425 2122.45,2435.5 2229.5,2435.5 2270.5,2394.5 2345.5,2394.5 2475,2265 U4.3@2516.3,2265 U4.3@2516.23,2265.07
A6: R2.1 S2.2 S2.5 U4.14 U5.8 | length 1657.3
  Top Layer w10: v1(1800,2425) 1800,2575
  Top Layer w20: S2.2@1752.76,2575 1800,2575 S2.5@1847.24,2575 ; v1(1800,2730) 1827.56,2757.56 R2.1@1827.56,2825
  Layer 1 w10: v1(1800,2425) v1(1800,2730)
  Bottom Layer w10: U5.8@1425.08,2512.01 U5.8@1425.96,2512.89 ; U5.8@1442.11,2512.89 1549.37,2512.89 1598.27,2464 1800,2464 1856,2464 1905,2415 1907.59,2415 1908.09,2414.5 2005.5,2414.5 2025.5,2394.5 2071.37,2394.5 2072.37,2395.5 2124.5,2395.5 2255,2265 U4.14@2303.7,2265 ; v1(1800,2425) 1800,2460
A7: R1.1 S1.2 S1.5 U4.12 U5.9 | length 1735.5
  Top Layer w10: v1(1555,2420) 1555,2575
  Top Layer w20: S1.2@1507.76,2575 1555,2575 S1.5@1602.24,2575 ; v1(1555,2730) 1582.56,2757.56 R1.1@1582.56,2825
  Layer 1 w10: v1(1555,2730) v1(1555,2420) 1735,2420 1760.5,2394.5 2057.63,2394.5 2058.63,2395.5 2109.5,2395.5 2225,2280 v1(2225,2200)
  Bottom Layer w10: U5.9@1442.73,2486.81 1528.19,2486.81 1555,2460 v1(1555,2420) v1@1557.96,2417.04 ; v1(2225,2200) 2230,2200 2265,2165 U4.12@2303.7,2165
B0: R16.1 S16.2 S16.5 U6.2 U9.1 | length 2757.8
  Top Layer w10: v1(3280,1630) 3280,1785
  Top Layer w20: S16.2@3232.76,1785 3280,1785 S16.5@3327.24,1785 ; v1(3280,1940) 3280,1944.06 3307.56,1971.62 R16.1@3307.56,2035
  Layer 1 w10: v1(3280,1630) v1(3280,1940)
  Bottom Layer w10: U6.2@1448.81,1873.19 1472.27,1873.19 1576.96,1768.5 1697.29,1768.5 1713.79,1752 1933.33,1752 1952.83,1732.5 2177.37,1732.5 2193.87,1716 2424,1716 2439,1701 2664.91,1701 2679.91,1686 2839.46,1686 2861.46,1664 3044.13,1664 3078.13,1630 ; U9.1@3018.19,1545 3080,1545 3095,1560 3095,1613.13 3078.13,1630 ; v1(3280,1630) 3078.13,1630
B1: R15.1 S15.2 S15.5 U6.3 U9.5 | length 2701.5
  Top Layer w10: 3033.57,1785 3033.57,1631.43 v1(3035,1630)
  Top Layer w20: S15.2@2986.33,1785 3033.57,1785 S15.5@3080.82,1785 ; v1(3035,1940) 3035,1944.06 3061.13,1970.19 R15.1@3061.13,2035
  Layer 1 w10: v1(3035,1940) 3032.5,1937.5 3032.5,1632.5 v1(3035,1630) 3080,1585 v1(3080,1410)
  Bottom Layer w10: U6.3@1442.46,1847.99 1472.01,1847.99 1569.5,1750.5 1689.83,1750.5 1706.33,1734 1925.87,1734 1945.37,1714.5 2169.92,1714.5 2187.92,1696.5 2413.5,1696.5 2427,1683 2657.46,1683 2672.46,1668 2832,1668 2854,1646 3019,1646 v1(3035,1630) ; U9.5@3018.19,1345 3054.79,1345 3080,1370.21 v1(3080,1410)
B2: R14.1 S14.2 S14.5 U6.4 U9.8 | length 2673.1
  Top Layer w10: v1(2785,1630) 2785,1782.86 2787.14,1785
  Top Layer w20: S14.2@2739.9,1785 2787.14,1785 S14.5@2834.39,1785 ; v1(2785,1940) 2785,1944.06 2814.7,1973.76 R14.1@2814.7,2035
  Layer 1 w10: v1(2715,1235) 2715,1240 2660,1295 2660,1560 2730,1630 v1(2785,1630) v1(2785,1940)
  Bottom Layer w10: U6.4@1442.2,1822.8 1471.75,1822.8 1562.04,1732.5 1682.37,1732.5 1698.87,1716 1918.42,1716 1937.92,1696.5 2162.46,1696.5 2180.46,1678.5 2401.5,1678.5 2415,1665 2650,1665 2665,1650 2765,1650 v1(2785,1630) ; v1(2715,1235) 2750,1235 2760,1245 U9.8@2791.81,1245
B3: R13.1 S13.2 S13.5 U6.5 U9.12 | length 2204.5
  Top Layer w10: v1(2540,1630) 2540,1784.29 2540.71,1785
  Top Layer w20: S13.2@2493.47,1785 2540.71,1785 S13.5@2587.96,1785 ; v1(2540,1940) 2540,1944.06 2568.27,1972.33 R13.1@2568.27,2035
  Layer 1 w10: v1(2540,1630) v1(2540,1940) ; v1(2735,1455) v1(2735,1525)
  Bottom Layer w10: U6.5@1440.86,1797.6 1471.49,1797.6 1554.59,1714.5 1674.92,1714.5 1691.42,1698 1910.96,1698 1930.46,1678.5 2155.01,1678.5 2173.01,1660.5 2394.04,1660.5 2409.54,1645 2521.64,1645 2536.64,1630 v1(2540,1630) 2645,1525 v1(2735,1525) ; v1(2735,1455) 2741.76,1455 2751.76,1445 U9.12@2791.81,1445
B4: R12.1 S12.2 S12.5 U6.6 U10.1 | length 1944.5
  Top Layer w10: 2294.29,1785.71 2295,1785 v1(2295,1630)
  Top Layer w20: S12.2@2247.04,1785 2295,1785 S12.5@2341.53,1785 ; v1(2295,1940) 2295,1944.06 2321.84,1970.9 R12.1@2321.84,2035
  Layer 1 w10: v1(2295,1630) v1(2295,1940)
  Bottom Layer w10: U6.6@1438.51,1772.4 1471.23,1772.4 1547.13,1696.5 1667.46,1696.5 1683.96,1680 1903.51,1680 1923.01,1660.5 2147.55,1660.5 2168.05,1640 2278.24,1640 2288.24,1630 v1(2295,1630) 2305,1640 2389.09,1640 2429.59,1599.5 2540.5,1599.5 2560,1580 2560,1550.86 2554.14,1545 U10.1@2523.19,1545
B5: R11.1 S11.2 S11.5 U6.7 U10.5 | length 2206.2
  Top Layer w10: 2047.86,1785 2050,1782.86 v1(2050,1630)
  Top Layer w20: S11.2@2000.61,1785 2047.86,1785 S11.5@2095.1,1785 ; v1(2050,1940) 2050,1944.06 2075.42,1969.48 R11.1@2075.42,2035
  Layer 1 w10: v1(2050,1940) v1(2050,1630) 2060,1640 2225,1640 2275,1590 2320,1590 2349.5,1560.5 2349.5,1360.5 2395,1315 2459.12,1315 2519.12,1375 v1(2580,1375)
  Bottom Layer w10: U6.7@1438.25,1747.2 1470.97,1747.2 1539.68,1678.5 1660.01,1678.5 1678.01,1660.5 1897.55,1660.5 1918.05,1640 2033.24,1640 2043.24,1630 v1(2050,1630) ; U10.5@2523.19,1345 2528.03,1349.84 2554.84,1349.84 v1(2580,1375)
B6: R10.1 S10.2 S10.5 U6.8 U10.8 | length 1864.3
  Top Layer w10: 1801.43,1785 1800,1783.57 v1(1800,1630) 1835,1630 1850,1615 v1(1850,1565)
  Top Layer w20: S10.2@1754.18,1785 1801.43,1785 S10.5@1848.67,1785 ; v1(1800,1940) 1800,1944.06 1828.99,1973.05 R10.1@1828.99,2035
  Layer 1 w10: v1(1800,1630) v1(1800,1940)
  Bottom Layer w10: U6.8@1437.99,1722.01 1470.71,1722.01 1532.22,1660.5 1652.55,1660.5 1674.55,1638.5 1791.5,1638.5 v1(1800,1630) ; v1(1850,1565) 1865,1580 2105,1580 2264.13,1420.87 2264.13,1251.73 2270.86,1245 U10.8@2296.81,1245
B7: R9.1 S9.2 S9.5 U6.9 U10.12 | length 1645.6
  Top Layer w10: v1(1555,1630) 1555,1785
  Top Layer w20: S9.2@1507.76,1785 1555,1785 S9.5@1602.24,1785 ; v1(1555,1940) 1555,1944.06 1582.56,1971.62 R9.1@1582.56,2035
  Layer 1 w10: v1(1555,1630) v1(1555,1940)
  Bottom Layer w10: U6.9@1425.04,1696.81 U6.9@1427.52,1699.29 ; U6.9@1433.19,1696.81 1470.45,1696.81 1537.27,1630 v1(1555,1630) 1565,1640 1645,1640 1664.5,1620.5 1766.37,1620.5 1787.37,1599.5 2115.5,1599.5 2270,1445 U10.12@2296.81,1445
DIGIT_1: DS1.3 DS1.8 Q1.2 | length 727.2
  Top Layer w20: DS1.3@2340,348.06 2362.87,370.93 2362.87,422.67 2375.5,435.3 2375.5,849.5 2345,880 DS1.8@2345,933.21 ; v1(2340,1020) 2340,944 DS1.8@2340.39,943.61
  Bottom Layer w10: v1(2340,1020) 2340,1056.34 Q1.2@2341.26,1057.6
DIGIT_2: DS2.3 DS2.8 Q2.2 | length 706.2
  Top Layer w10: v1(2755,1020) 2755,946.3 DS2.8@2757.7,943.61
  Top Layer w20: DS2.3@2757.7,353.06 DS2.8@2757.7,943.61
  Bottom Layer w10: v1(2755,1020) 2755,1056.34 Q2.2@2756.26,1057.6
DIGIT_3: DS3.3 DS3.8 Q3.2 | length 705.1
  Top Layer w20: DS3.3@3175,353.06 DS3.8@3175,943.61 v1(3175,1020)
  Bottom Layer w10: v1(3175,1020) 3175,1056.34 Q3.2@3176.26,1057.6
DQ1: Q1.1 R36.2 U1.2 | length 1023.2
  Layer 1 w10: v1(1715,835) 1717.5,837.5 1762.5,837.5 1774.5,849.5 1774.5,963.64 1785.86,975 1980,975 v1(2115,1110)
  Bottom Layer w10: v1(1715,835) 1715.5,834.5 1715.5,745.86 1721.36,740 U1.2@1753.19,740
  Bottom Layer w20: v1(2115,1110) 2137.4,1132.4 Q1.1@2341.26,1132.4 2372.6,1132.4 2381.56,1123.44 R36.2@2415,1123.44
DQ2: Q2.1 R37.2 U1.3 | length 1863.5
  Layer 1 w10: v1(1900,1095) v1(1970,1095)
  Layer 2 w10: v1(1685,765) 1870,765 1915,810 1915,1080 v1(1900,1095) ; v1(1970,1095) 1970,1109.54 2022.46,1162 2700.59,1162 2708.59,1170 2878.37,1170 2890.87,1157.5 2890.87,1134.63 v1(2895,1130.5)
  Bottom Layer w10: v1(1685,765) 1689.78,760.22 1689.78,735.22 1730.16,694.84 1748.35,694.84 U1.3@1753.19,690
  Bottom Layer w20: Q2.1@2756.26,1132.4 2787.6,1132.4 2796.56,1123.44 R37.2@2830,1123.44 2834.19,1127.63 2892.13,1127.63 v1(2895,1130.5)
DQ3: Q3.1 R38.2 U1.5 | length 2344.1
  Layer 2 w10: v1(1685,665) 1855,665 1935,745 1935,1103.13 2011.87,1180 2693.13,1180 2701.13,1188 2885.82,1188 2933.82,1140 3284.04,1140 3304.04,1120 v1(3310,1120)
  Bottom Layer w10: v1(1685,665) 1689.78,660.22 1689.78,615.22 1715,590 U1.5@1753.19,590
  Bottom Layer w20: Q3.1@3176.26,1132.4 3212.6,1132.4 3221.56,1123.44 R38.2@3250,1123.44 3251.72,1121.72 3308.28,1121.72 v1(3310,1120)
DS_A: R26.1 U2.13 | length 112.9
  Bottom Layer w20: U2.13@2053.35,620 U2.13@2054.17,619.17 ; U2.13@2065,620 2065.83,619.17 2119.83,619.17 2151.28,587.72 2153.25,587.72 2159,581.97 R26.1@2159,580
DS_A_R: DS1.7 DS2.7 DS3.7 R26.2 | length 1715.4
  Top Layer w20: DS1.7@2414.8,938.61 2415,938.41 v1(2415,775) ; v1(2830,780) 2830,938.8 2834.8,943.61 DS2.7@2840,938.41 ; DS3.7@3249.8,943.61 3250,943.41 v1(3250,780)
  Layer 1 w20: v1(2415,775) 2417.5,777.5 2827.5,777.5 v1(2830,780) v1(3250,780)
  Layer 2 w20: v1(2260,580) 2380,580 2415,615 v1(2415,775)
  Bottom Layer w20: R26.2@2217.5,582.5 R26.2@2215,580 v1(2260,580)
DS_B: R27.1 U2.12 | length 105.2
  Bottom Layer w20: U2.12@2053.35,670 U2.12@2054.17,669.17 ; U2.12@2065,670 2140.98,670 2152.28,658.7 2154.25,658.7 2160,652.95 R27.1@2160,650.98
DS_B_R: DS1.6 DS2.6 DS3.6 R27.2 | length 1793.8
  Top Layer w20: DS1.6@2467.28,916.28 DS1.6@2489.61,938.61 ; v1(2490,740) DS1.6@2490,943.61 ; v1(2905,740) DS2.6@2905,941.3 ; v1(3320,740) 3320,939 DS3.6@3324.61,943.61 DS3.6@3325,943.21
  Layer 1 w20: v1@2489.5,739.5 v1(2490,740) v1(2905,740) v1(3320,740)
  Bottom Layer w20: R27.2@2221.75,657.5 2216,651.75 R27.2@2216,650.98 2216.49,650.49 2264.51,650.49 v1(2265,650) 2400,650 v1(2490,740)
DS_C: R28.1 U2.11 | length 94
  Bottom Layer w20: U2.11@2065,720 R28.1@2159,720